# Altium PCB OpenRex_V1I1_PCB_reduced.PcbDoc
Units mm, origin at the board's own origin, x right, y up, seen from the top; angles counter-clockwise.
Board outline 70 x 95 mm, 10 copper layers (L1, L2, L3, L4 (PWR), L5 (PWR), L6 (PWR), L7 (PWR), L8, L9, L10), stack 1.632 mm thick; 1 components, 0 nets, 0 pads, 0 vias.
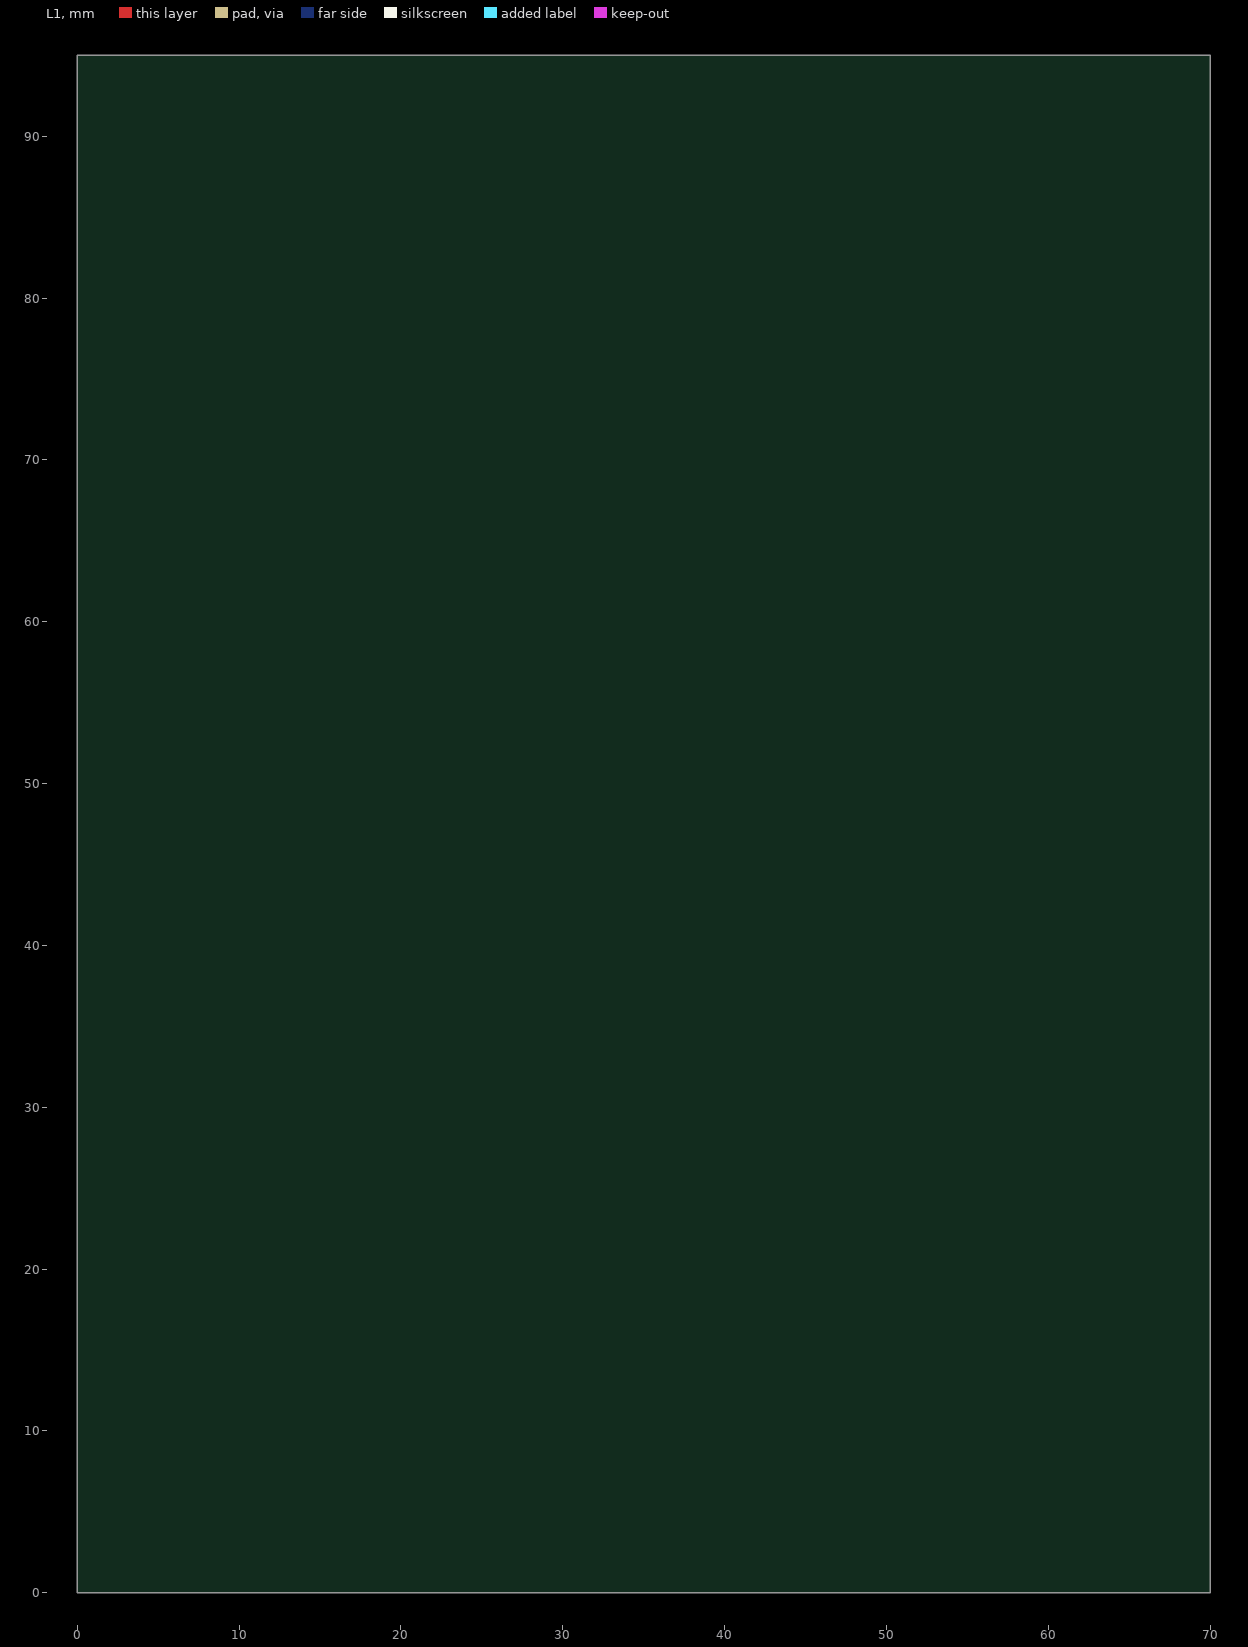
[diagram p0: L1 view]
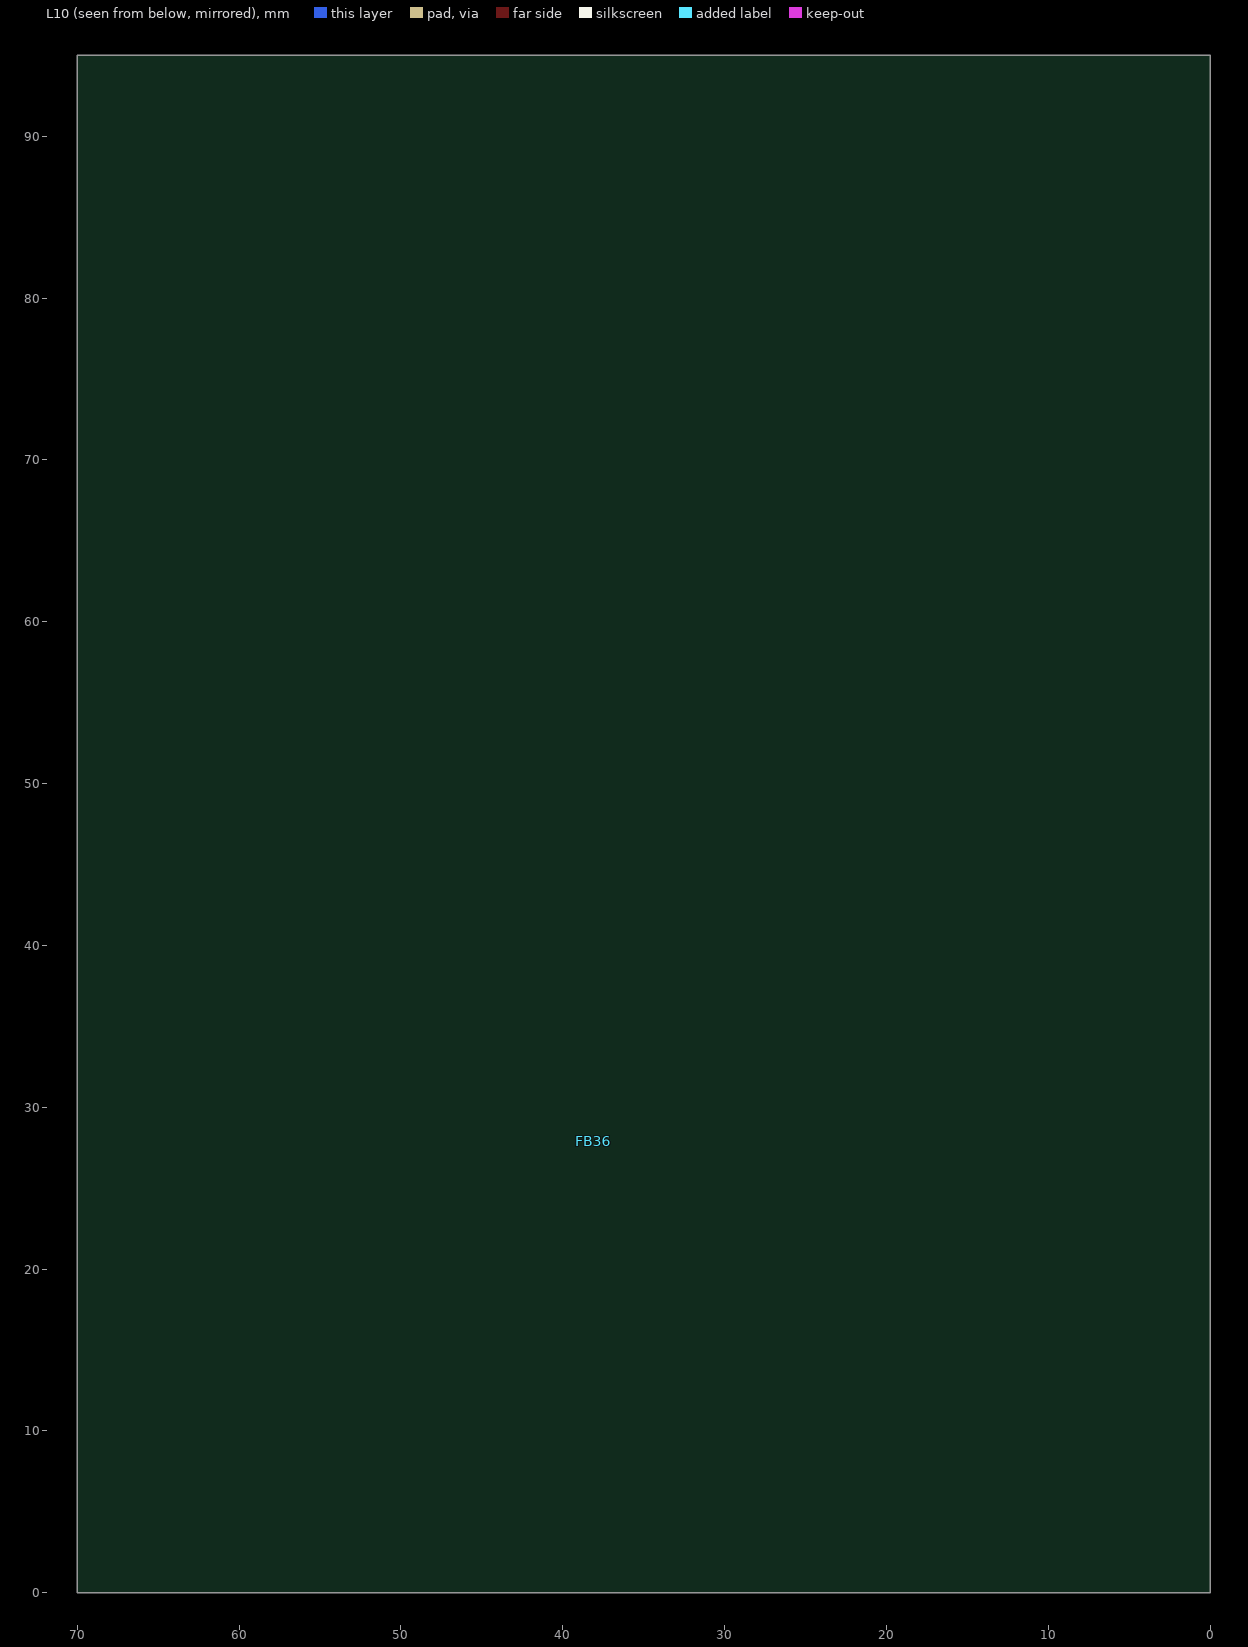
[diagram p1: L10 view, seen from below]
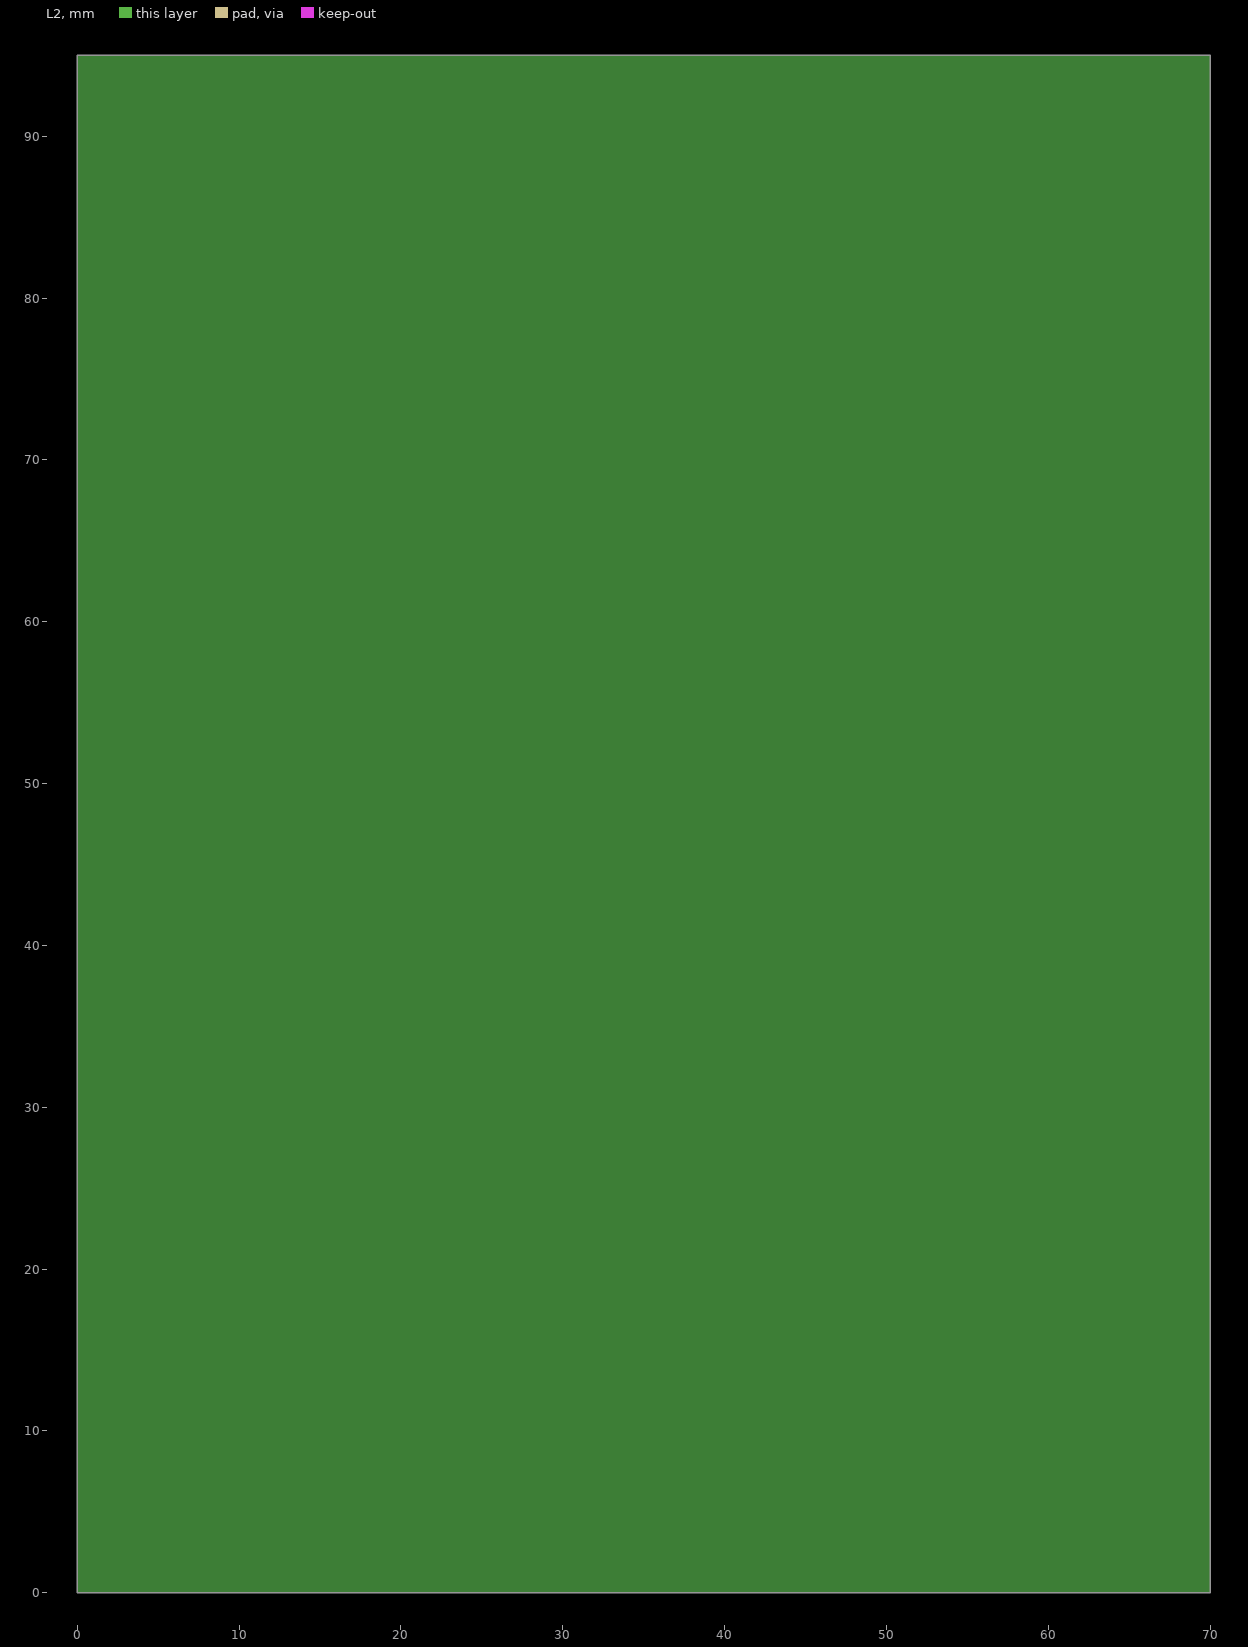
[diagram p2: L2, clearances drawn from the general rule]
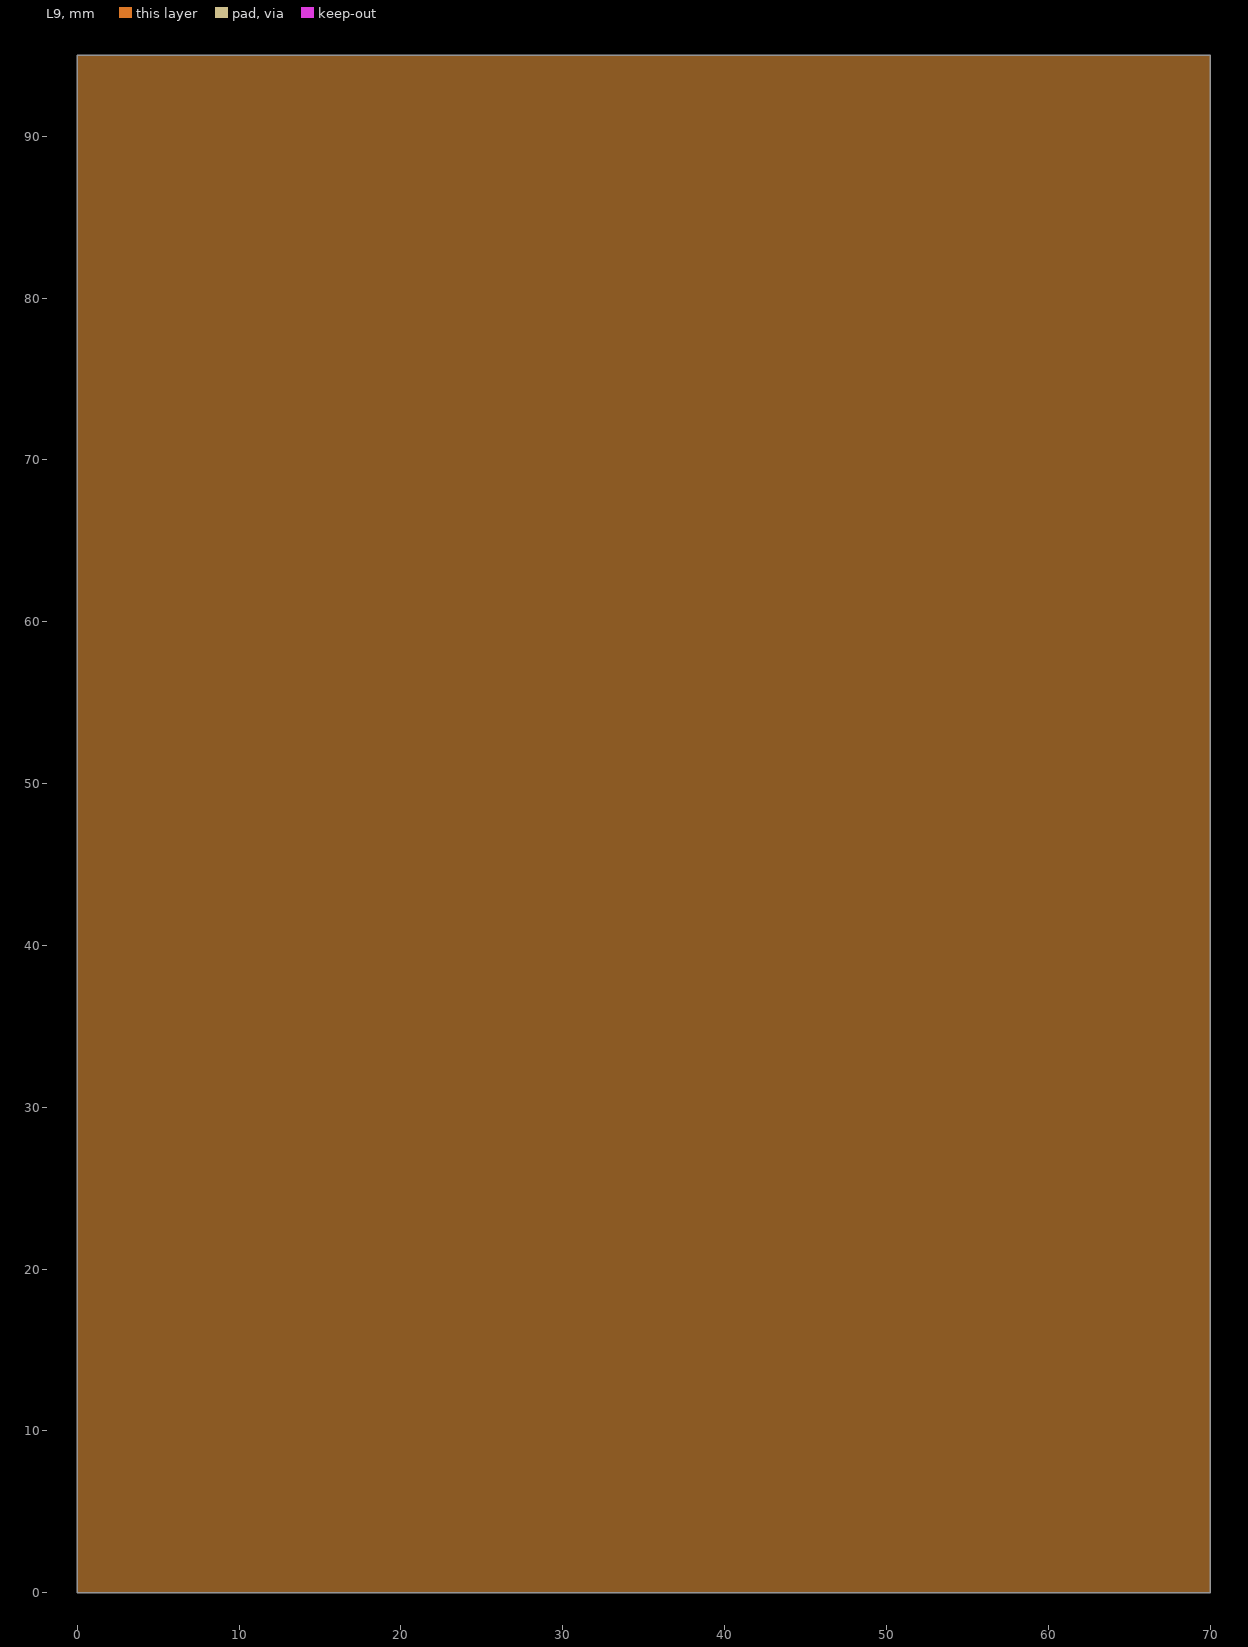
[diagram p3: L9, clearances drawn from the general rule]

## Layer stack, top to bottom
Top Solder: solder mask 0.02, Solder Resist, Dk 4.1
L1: signal copper 0.043
Dielectric1: core 0.074, VT47-1080, Dk 3.95
L2: plane copper 0.018, net GND
Dielectric2: prepreg 0.102, VT-47, Dk 4.12
L3: signal copper 0.018
Dielectric3: core 0.282, VT47-2113, Dk 4.06
L4 (PWR): signal copper 0.018
Dielectric4: prepreg 0.102, VT-47, Dk 4.12
L5 (PWR): signal copper 0.018
Dielectric 8: dielectric 0.282, VT47-2113, Dk 4.06
L6 (PWR): signal copper 0.018
Dielectric 9: dielectric 0.102, VT-47, Dk 4.12
L7 (PWR): signal copper 0.018
Dielectric5: core 0.282, VT47-2113, Dk 4.06
L8: signal copper 0.018
Dielectric6: prepreg 0.102, VT-47, Dk 4.12
L9: plane copper 0.018, net GND
Dielectric7: core 0.074, VT47-1080, Dk 3.95
L10: signal copper 0.043
Bottom Solder: solder mask 0.02, Solder Resist, Dk 4.1

## Board outline
0,0 70,0 70,95 0,95

## Components (designator, comment, footprint, x,y, rotation, side; value= is the part's Value field where it differs from the comment)
FB36 "" C0603 38.1,27.9 r0 bottom

## Footprints (in the part's own frame and the unit in brackets; to place one, negate y for a bottom-side part, rotate by r counter-clockwise, add the part's x,y. Pads: shape width x height; smd on the part's side, far side on the other; paste and mask are expansions set on the pad)
C0603 [mm]
  body extent -0.8,-0.42 0.8,0.44, height 0.95

## Part data
FB36: library part MPZ1608S601A, "FERRITE CHIP BEAD 600 OHM SMD 1A"

## Nets (pads, with @x,y where several pads share a name; then routed paths per layer and width w, separated by ;. In a path a pad name is that pad's centre, name@x,y a point inside that pad or via, vN(x,y) a via of type N, cw(c..) or ccw(c..) an arc to the next point about the centre after c; other vN are vias at no path point)